# Altium PCB CH382CRD.PcbDoc
Units mil, origin at the board's own origin, x right, y up, seen from the top; angles counter-clockwise.
Board outline 2123 x 4247.94 mil, 2 copper layers (TopLayer, BottomLayer); 58 components, 90 nets, 316 pads, 158 vias.
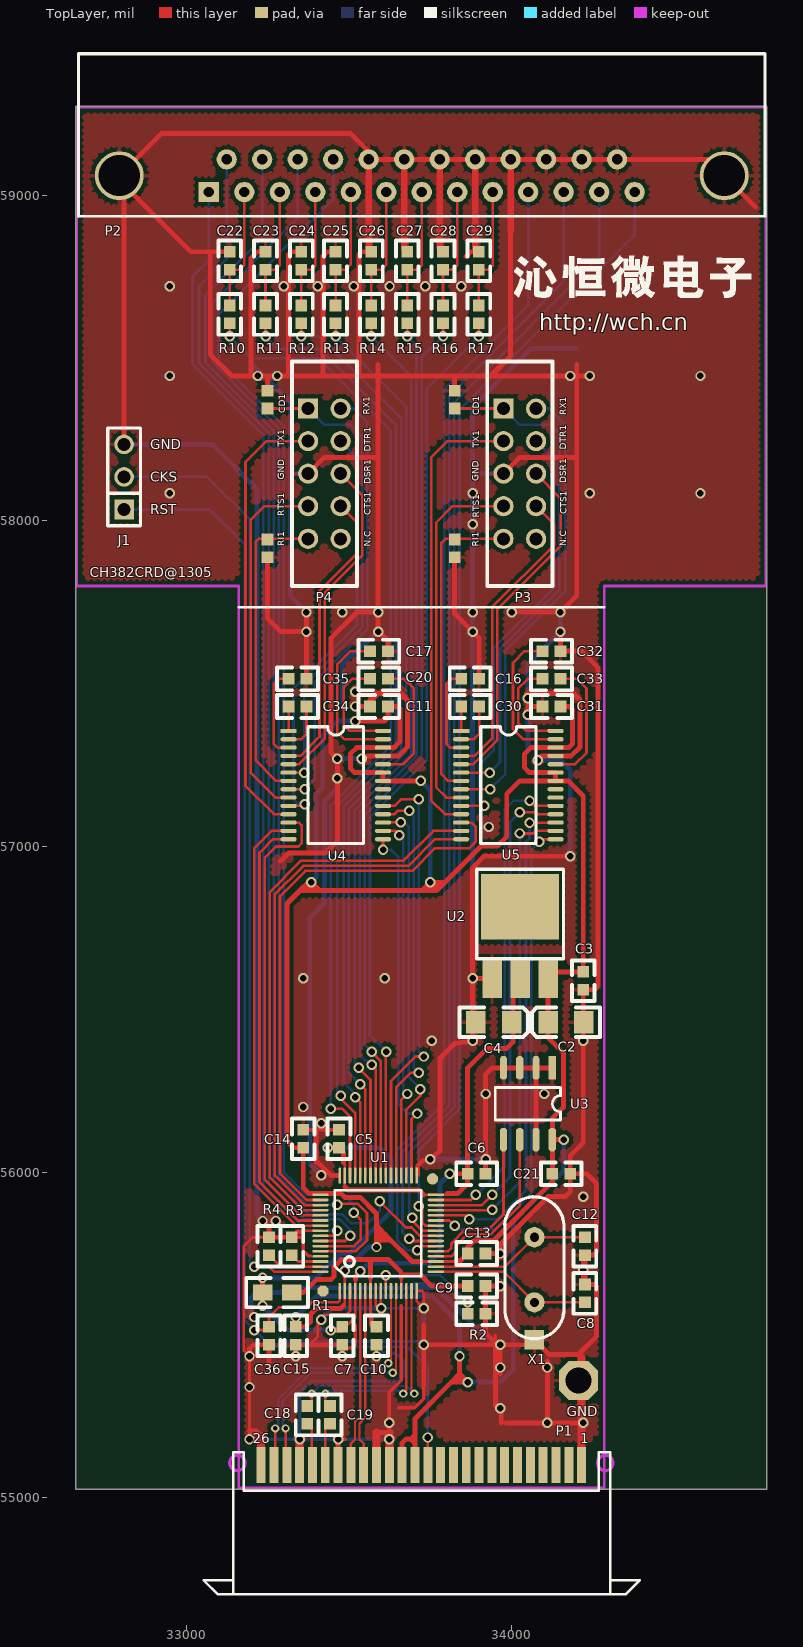
[diagram p0: TopLayer view]
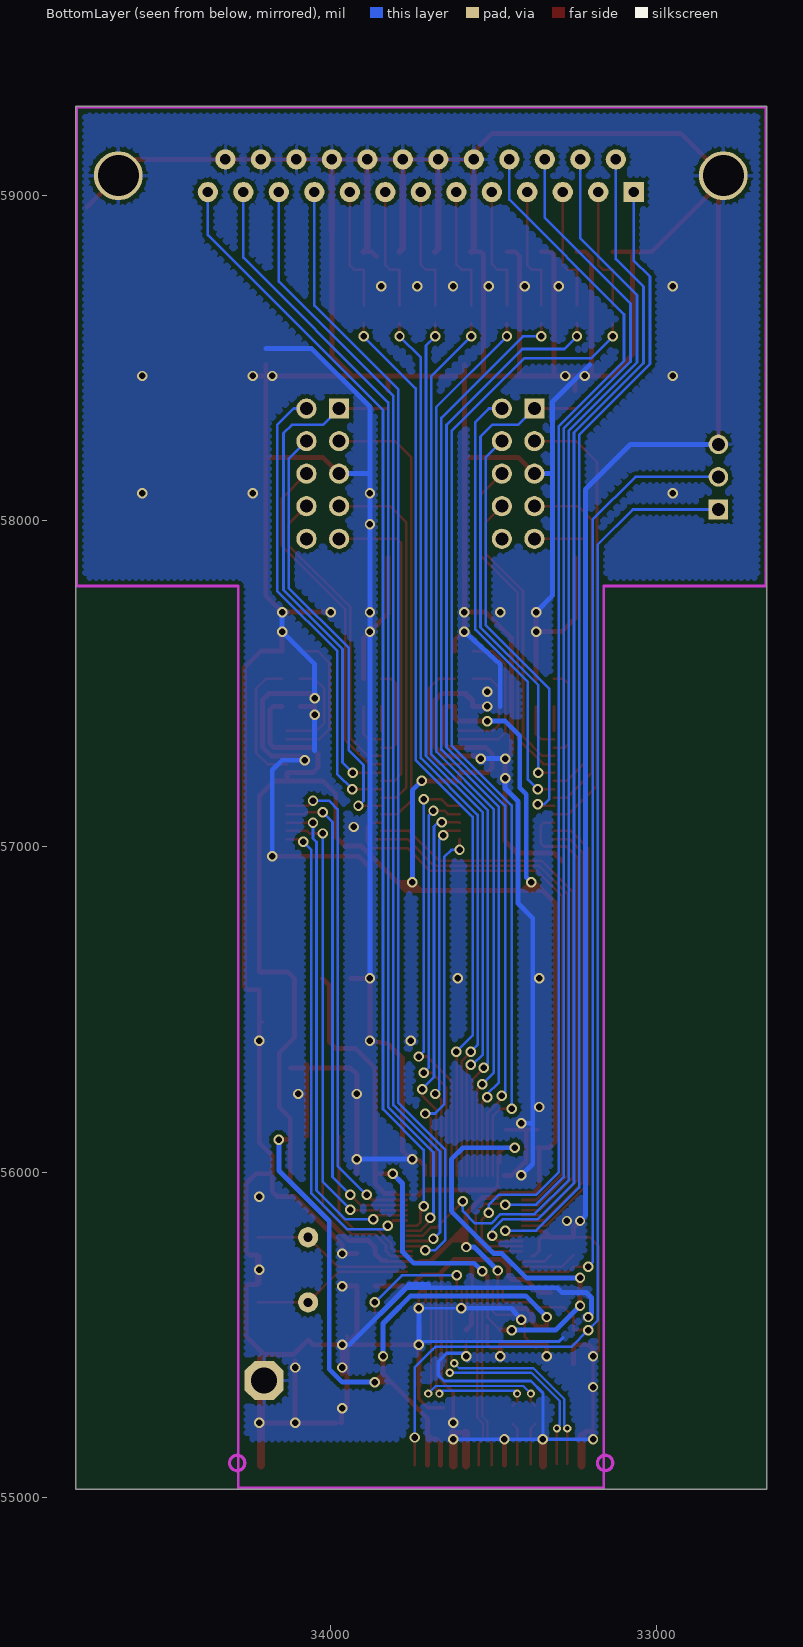
[diagram p1: BottomLayer view, seen from below]

## Layer stack, top to bottom
TopSolder: solder mask 0.4, Solder Resist, Dk 3.5
TopLayer: signal copper 1.4
Dielectric1: dielectric 12.6, FR-4, Dk 4.8
BottomLayer: signal copper 1.4
BottomSolder: solder mask 0.4, Solder Resist, Dk 3.5

## Board outline
32661,55026.06 34784,55026.06 34784,59274 32661,59274

## Design rules (kind name [scope] priority, off if disabled: settings)
Clearance Clearance_4 [(InPoly) vs InNetClass('PARTS')] p1: gap=12 ignorepadtopadclearanceinfootprint=FALSE
Clearance Clearance_2 [All vs InNetClass('PARTS')] p2: gap=7 ignorepadtopadclearanceinfootprint=FALSE
Clearance Clearance_5 [InComponent('U2')] p3: gap=15 ignorepadtopadclearanceinfootprint=FALSE
Clearance Clearance_1 [All vs (InPoly)] p4: gap=12 ignorepadtopadclearanceinfootprint=FALSE
Clearance [All] p5: gap=7.75 ignorepadtopadclearanceinfootprint=FALSE
ComponentClearance [All] p1 off: gap=10 collisioncheckmode=3 verticalgap=10 showdistances=FALSE
FabricationTestPointUsage TestPointUsage [All] p1: valid=0 allowmultiple=FALSE
FabricationTestpoint Testpoint [All] p1: side=3 testpointundercomponent=TRUE minsize=40 maxsize=100 preferedsize=60 minholesize=20 maxholesize=40 preferedholesize=32 testpointgrid=1 allowsidetop=TRUE allowsidebottom=TRUE usegrid=TRUE gridtolerance=0.01
HoleSize [All] p1 off: absolutevalues=TRUE maxlimit=120 minlimit=1 maxpercent=80.000 minpercent=20.000
PolygonConnect [All] p1: connectstyle=Relief reliefconductorwidth=10 reliefentries=4 polygonreliefangle="90 Angle" airgapwidth=10
RoutingVias RoutingVias_2 [InNetClass('PARTS')] p1: holewidth=14 width=25 viastyle="Through Hole" minholewidth=14 minwidth=25 maxholewidth=28 maxwidth=50
RoutingVias RoutingVias_1 [InNetClass('PARTS')] p2: holewidth=14 width=25 viastyle="Through Hole" minholewidth=14 minwidth=25 maxholewidth=28 maxwidth=50
RoutingVias [All] p3: holewidth=24 width=40 viastyle="Through Hole" minholewidth=24 minwidth=40 maxholewidth=28 maxwidth=40
SolderMaskExpansion [All] p1: expansion=4 istentingtop=FALSE
Width Width_2 [InNet('GND')] p1: maxlimit=30 minlimit=7 preferedwidth=15
Width Width_4 [InNetClass('PARTS')] p2: maxlimit=15 minlimit=7 preferedwidth=7
Width Width_3 [InNetClass('VCC')] p3: maxlimit=30 minlimit=7 preferedwidth=15
Width [All] p4: maxlimit=30 minlimit=7 preferedwidth=8
26 further rules are at their usual default settings.

## Classes and differential pairs
net class VCC: 1V8 3V3 3V3AUX +5V +12 -12 NetF1_2 NetJP1_3 NetU1_7
net class PARTS: NetU1_14 NetU1_15 PECKN PECKP PERN PERP PETN PETP

## Components (designator, comment, footprint, x,y, rotation, side; value= is the part's Value field where it differs from the comment)
C2 "10uF" 3216 34112,56460 r180 top
C3 "0.1uF" 0603 34220,56615 r270 top
C4 "10uF" 3216 34000,56460 r0 top
C5 "0.1uF" 0603 33470,56075 r90 top
C6 "0.1uF" 0603 33865,55995 r0 top
C7 "0.1uF" 0603 33480,55525 r270 top
C8 "27pF" 0603 34225,55600 r90 top
C9 "0.1uF" 0603 33865,55650 r0 top
C10 "0.1uF" 0603 33585,55525 r270 top
C11 "0.1uF" 0603 33620,57430 r180 top
C12 "27pF" 0603 34225,55800 r270 top
C13 "0.1uF" 0603 33865,55750 r0 top
C14 "0.1uF" 0603 33360,56075 r90 top
C15 "0.1uF" 0603 33337,55525 r270 top
C16 "0.1uF" 0603 33845,57515 r0 top
C17 "0.1uF" 0603 33565,57600 r0 top
C18 "0.1uF" 0603 33372,55227 r90 top
C19 "0.1uF" 0603 33442,55227 r90 top
C20 "0.1uF" 0603 33565,57515 r0 top
C21 "0.1uF" 0603 34125,55995 r0 top
C22 "100pF" 0603 33134.28,58771.58 r90 top
C23 "100pF" 0603 33244.28,58771.58 r90 top
C24 "100pF" 0603 33354.28,58771.58 r90 top
C25 "100pF" 0603 33459.28,58771.58 r90 top
C26 "100pF" 0603 33569.28,58771.58 r90 top
C27 "100pF" 0603 33679.28,58771.58 r90 top
C28 "100pF" 0603 33789.28,58771.58 r90 top
C29 "100pF" 0603 33899.28,58771.58 r90 top
C30 "0.1uF" 0603 33845,57430 r0 top
C31 "0.1uF" 0603 34150,57430 r180 top
C32 "0.1uF" 0603 34095,57600 r0 top
C33 "0.1uF" 0603 34095,57515 r0 top
C34 "0.1uF" 0603 33315,57430 r0 top
C35 "0.1uF" 0603 33315,57515 r0 top
C36 "1000pF" 0603 33255,55525 r270 top
J1 "3JUMPS" SIP3 32810,58035 r90 top
P1 "EXPRESS CARD" EXPCARD 34215,55100 r0 top locked
P2 "1284A" DB25RA/F 33070,59010 r0 top locked
P3 "CON10" IDC10 33975,58345 r0 top locked
P4 "CON10" IDC10 33375,58345 r0 top locked
R1 "0" 0805 33235,55630 r0 top
R2 "12K" 0603 33920,55565 r180 top
R3 "0" 0603 33325,55745 r90 top
R4 "NC" 0603 33255,55745 r90 top
R10 "33R" 0603 33134.28,58661.58 r270 top
R11 "33R" 0603 33244.28,58661.58 r270 top
R12 "33R" 0603 33354.28,58661.58 r270 top
R13 "33R" 0603 33459.28,58661.58 r270 top
R14 "33R" 0603 33569.28,58661.58 r270 top
R15 "33R" 0603 33679.28,58661.58 r270 top
R16 "33R" 0603 33789.28,58661.58 r270 top
R17 "33R" 0603 33899.28,58661.58 r270 top
U1 "CH382L" LQFP64 33472.01,55635 r0 top
U2 "LDO-1V8" SOT-223 33940,56595 r0 top
U3 "24C02" SOP8 34125,56320 r180 top
U4 "MAX3243" SSOP28 33315,57355 r0 top
U5 "MAX3243" SSOP28 33845,57355 r0 top
X1 "22.1184MHz" XTAL62/28 34070,55800 r180 top

## Footprints (in the part's own frame and the unit in brackets; to place one, negate y for a bottom-side part, rotate by r counter-clockwise, add the part's x,y. Pads: shape width x height; smd on the part's side, far side on the other; paste and mask are expansions set on the pad)
0603 [mil]
  rect 36x36 smd: 1(0,0) 2(55,0)
  silkscreen extent -35,-35 90,35
0805 [mil]
  rect 60x50 smd: 1(0,0) 2(90,0)
  silkscreen extent -50,-45 140,45
3216 [mil]
  rect 60x70 smd: 1(0,0) 2(-110,0)
  silkscreen extent -160,-45 50,45
DB25RA/F [mil]
  round 150 hole 125.98: 0(-275,50) 0(1583,50)
  rect 62x62 hole 32: 1(0,0)
  round 62 hole 32: 2(109,0) 3(218,0) 4(327,0) 5(436,0) 6(545,0) 7(654,0) 8(763,0) 9(872,0) 10(981,0) 11(1090,0) 12(1199,0) 13(1308,0) 14(55,100) 15(164,100) 16(273,100) 17(382,100) 18(491,100) 19(600,100) 20(709,100) 21(818,100) 22(927,100) 23(1036,100) 24(1145,100) 25(1254,100)
  silkscreen extent -400,-75 1708,425
EXPCARD [mm]
  rect 0.7x2.8 smd: 1(0,0) 2(-1,0) 3(-2,0) 4(-3,0) 5(-4,0) 6(-5,0) 7(-6,0) 8(-7,0) 9(-8,0) 10(-9,0) 11(-10,0) 12(-11,0) 13(-12,0) 14(-13,0) 15(-14,0) 16(-15,0) 17(-16,0) 18(-17,0) 19(-18,0) 20(-19,0) 21(-20,0) 22(-21,0) 23(-22,0) 24(-23,0) 25(-24,0) 26(-25,0)
  KeepOutLayer circle w0.254: c-26.849,0.172 r0.6
  KeepOutLayer circle w0.254: c1.851,0.172 r0.6
  silkscreen extent -29.48,-10.08 4.52,1.02
IDC10 [mil]
  rect 62x62 hole 40: 1(0,0)
  round 62 hole 40: 2(100,0) 3(0,-100) 4(100,-100) 5(0,-200) 6(100,-200) 7(0,-300) 8(100,-300) 9(0,-400) 10(100,-400)
  silkscreen extent -50,-545 150,144
LQFP64 [mm]
  round 0.889 smd: 0(-1.302,0) 0(7.246,8.746)
  rect 0.203x1.27 smd: 1(0,0)
  oval 0.203x1.27 smd: 2(0.4,0) 3(0.8,0) 4(1.2,0) 5(1.6,0) 6(2,0) 7(2.4,0) 8(2.8,0) 9(3.2,0) 10(3.6,0) 11(4,0) 12(4.4,0) 13(4.8,0) 14(5.2,0) 15(5.6,0) 16(6,0) 33(6,9) 34(5.6,9) 35(5.2,9) 36(4.8,9) 37(4.4,9) 38(4,9) 39(3.6,9) 40(3.2,9) 41(2.8,9) 42(2.4,9) 43(2,9) 44(1.6,9) 45(1.2,9) 46(0.8,9) 47(0.4,9) 48(0,9)
  oval 1.27x0.203 smd: 17(7.5,1.5) 18(7.5,1.9) 19(7.5,2.3) 20(7.5,2.7) 21(7.5,3.1) 22(7.5,3.5) 23(7.5,3.9) 24(7.5,4.3) 25(7.5,4.7) 26(7.5,5.1) 27(7.5,5.5) 28(7.5,5.9) 29(7.5,6.3) 30(7.5,6.7) 31(7.5,7.1) 32(7.5,7.5) 49(-1.5,7.5) 50(-1.5,7.1) 51(-1.5,6.7) 52(-1.5,6.3) 53(-1.5,5.9) 54(-1.5,5.5) 55(-1.5,5.1) 56(-1.5,4.7) 57(-1.5,4.3) 58(-1.5,3.9) 59(-1.5,3.5) 60(-1.5,3.1) 61(-1.5,2.7) 62(-1.5,2.3) 63(-1.5,1.9) 64(-1.5,1.5)
  silkscreen extent -0.39,1.15 6.36,7.86
SIP3 [mil]
  rect 60x60 hole 40: 1(0,0)
  round 60 hole 40: 2(100,0) 3(200,0)
  silkscreen extent -50,-50 250,50
SOP8 [mil]
  rect 22x72 smd: 1(0,0)
  oct 22x72 smd: 2(50,0) 3(100,0) 4(150,0) 5(150,220) 6(100,220) 7(50,220) 8(0,220)
  silkscreen extent -25,60 175,160
SOT-223 [mil]
  rect 60x120 smd: 1(0,0) 2(86,0) 3(172,0)
  rect 240x200 smd: ""(86,220)
  silkscreen extent -47,60 219,335
SSOP28 [mil]
  rect 50x13 smd: 1(0,0)
  oval 50x13 smd: 2(0,-25.59) 3(0,-51.18) 4(0,-76.77) 5(0,-102.36) 6(0,-127.96) 7(0,-153.55) 8(0,-179.14) 9(0,-204.73) 10(0,-230.32) 11(0,-255.91) 12(0,-281.5) 13(0,-307.09) 14(0,-332.68) 15(290,-332.68) 16(290,-307.09) 17(290,-281.5) 18(290,-255.91) 19(290,-230.32) 20(290,-204.73) 21(290,-179.14) 22(290,-153.55) 23(290,-127.96) 24(290,-102.36) 25(290,-76.77) 26(290,-51.18) 27(290,-25.59) 28(290,0)
  silkscreen extent 60,-345 230,13
XTAL62/28 [mil]
  rect 60x60 smd: 0(0,315)
  round 62 hole 28: 1(0,0) 2(0,200)
  silkscreen extent -91,-124 91,312

## Part data
C2 C4: library part Pro89C.tmp_10u_4
C3 C5 C6 C7 C9 C10 C13 C14 C15 C21: library part Pro89C.tmp_0.1u_3
C8 C12 C36: library part Pro5B1.tmp_27p_3
C11 C16 C17 C20 C30 C31 C32 C33 C34 C35: library part CAPACITOR, "Capacitor"
C18: library part Pro89C.tmp_0.1u_70
C19: library part Pro89C.tmp_0.1u_71
C22 C23 C24 C25 C26 C27 C28 C29: library part CAP, "Capacitor"
J1: library part Pro5B1.tmp_3JUMPS_1
P1: library part EXPRESSCARD
P3 P4: "Connector"
R1: library part Pro89C.tmp_0_1
R2: library part Pro5B1.tmp_12K_15
R3 R4: library part Pro3F8.tmp_0_4
R10 R11 R12 R13 R14 R15 R16 R17: library part RES2
U1: "PCIe to 2S1P: Print Port / Parallel and Dual 16C550 UART with 256 byte FIFO"
U2: library part Pro89C.tmp_LDO-1V8_68
U3: library part Pro89C.tmp_24C02_11
X1: library part Pro5B1.tmp_22.1184MHz_4

## Free pads (board coordinates)
  oct 120x120 hole 80: 0(34205,55360)
  rect 36x36 smd: 1(33250,57943) 1(33250,58345) 1(33825,57943) 1(33825,58345) 2(33250,57888) 2(33250,58400) 2(33825,57888) 2(33825,58400)

## Via types
v1: diameter 32, hole 20, TopLayer to BottomLayer, 150 vias
v2: diameter 25, hole 14, TopLayer to BottomLayer, 8 vias

## Nets (pads, with @x,y where several pads share a name; then routed paths per layer and width w, separated by ;. In a path a pad name is that pad's centre, name@x,y a point inside that pad or via, vN(x,y) a via of type N, cw(c..) or ccw(c..) an arc to the next point about the centre after c; other vN are vias at no path point)
1V8: C4.1 C5.1 C6.1 C7.1 R1.1 U1.4 U1.32 U1.47 U2.2 | length 3283
  TopLayer w8: C7.1@33480,55515 33519.25,55554.25 33519.25,55670 ; 33487.76,55955 33487.76,56030 ; 33730,55930.28 33803.5,55930.28
  TopLayer w15: v1(33235,55590) v1(33235,55675) ; v1(33435,56075) C5.1 33484.26,56060.74 33484.26,56030 ; v1(33445,55515) C7.1@33480,55515 ; 33487.76,55955 33497.76,55945 33715.28,55945 33730,55930.28 ; 33520,55670 33520,55680 v1(33535,55695) ; 33803.5,55933.78 33833.78,55933.78 33865,55965 33865,56320 33925,56380 33985,56380 34005,56400 34005,56574 U2.2 ; v1(33810,55995) C6.1
  BottomLayer w15: v1(33235,55590) 33310,55515 v1(33445,55515) ; v1(33235,55675) 33365,55675 33395,55675 33400,55675 33475,55750 33500,55750 33515,55765 33630,55880 33630,56039.25 33594.25,56075 v1(33435,56075) ; v1(33535,55695) 33560,55720 33745,55720 33780,55755 33780,55965 v1(33810,55995)
3V3: C2.1 C3.1 C11.1 C13.1 C14.1 C15.1 C21.1 C31.1 P1.14 P1.15 U1.2 U1.19 U1.49 U2.3 U3.8 U4.22 U4.23 U4.26 U5.22 U5.23 U5.26 | length 9843.6
  TopLayer w8: 33484.26,55585.39 33487.76,55588.89 33487.76,55680 ; 33725,55725.55 33840.55,55725.55
  TopLayer w15: v1(33337,55555) C15.1 33367,55525 33382,55540 33382,55562.75 ; C14.1 33360,55952.22 33378.45,55933.78 33476.81,55933.78 33488.33,55922.25 33534.97,55922.25 33585,55872.22 v1(33585,55770) 33585,55778 33607,55800 ; C14.1@33365,56075 33330,56075 33310,56095 33310,56825 33350,56865 ; 33382,55557.78 33382,55562.75 ; 33385,56865 v1(33385,56890) ; 33433,56865 33410,56865 v1(33385,56890) ; 33484.26,55590.75 33474.26,55580.75 33400,55580.75 33382,55562.75 ; 33487.76,55680 v1(33487.76,55697.76) ; v1(33520,57385) 33610,57385 33620,57395 C11.1 33649,57430 33657.25,57421.75 33657.25,57322.25 33655,57320 33638.82,57303.82 33523.82,57303.82 33505,57285 33505,57240 33517.96,57227.04 U4.23 U4.22 v1(33721.3,57201.45) ; 33585,55800 33620,55800 ; 33585,55810 33610,55810 33620,55800 ; 33585,55845 33585,55835 33620,55800 ; 33599,55792 33626.43,55792 ; P1.15 33663.82,55168.82 33675,55180 33703.19,55180 ; P1.14 33703.19,55234 33703.19,55243.19 33815,55355 ; 33703.19,55166.81 33690,55180 33703.19,55193.19 ; 33704,56865 33725,56865 v1(33750,56890) ; 33725,55725.55 33694.45,55725.55 33620,55800 ; 33750,56865 v1(33750,56890) ; 33780,56876 33764,56876 v1(33750,56890) ; 33794.74,56890 v1(33750,56890) ; 33829.97,55729.05 33844.05,55729.05 C13.1 33865,55770 33885,55790 33945,55790 34125,55970 34125,56165 34158.74,56198.74 34158.74,56366.26 34112,56413 U2.3 34132,56615 C3.1 34220,57155 34173.55,57201.45 34025,57201.45 33985,57161.45 33985,57030 33956.47,57001.47 33906.47,57001.47 33770,56865 33350,56865 ; 33840,55355 v1(33840,55434) ; U3.8 v1(34160,56100) ; U5.22 U5.23 34055,57227.04 34040,57242.04 34040,57285 34058.82,57303.82 34168.82,57303.82 ; U5.26 34174.82,57303.82 34187.25,57316.25 34187.25,57419.75 34177,57430 C31.1 ; 33350,56865 33375,56890 v1(33385,56890) ; 33350,56865 33360,56865 v1(33385,56890) ; 33815,55355 33840,55380 v1(33865,55355) 33815,55355
  BottomLayer w15: v1(33337,55555) 33402,55620 33755,55620 33820,55555 33840,55535 33840,55490 v1(33840,55434) ; v1(33385,56890) 33400,56905 33400,57160 33420,57180 33420,57340 33465,57385 v1(33520,57385) ; v1(33487.76,55697.76) 33560,55770 v1(33585,55770) ; v1(33721.3,57201.45) 33750,57172.76 v1(33750,56890) ; v1(33865,55355) 33965,55355 34005,55395 34005,55850 34160,56005 v1(34160,56100)
ACK: P2.10 U1.22 | length 3521.7
  TopLayer w8: v1(33710,55760) 33722.8,55772.8 U1.22
  BottomLayer w8: v1(33710,55760) 33680,55760 33649.25,55790.75 33649.25,56069.25 33792.76,56212.76 33792.76,58402.76 34051,58661 P2.10
AFD: P2.14 U1.58 | length 3694.8
  TopLayer w8: U1.58 33488.54,55788.54 v1(33505,55805)
  BottomLayer w8: P2.14 33125,58804.25 33040,58719.25 33040,58484.28 33253.51,58270.77 33253.51,55966.49 33364.98,55855.02 33472.71,55855.02 33505,55822.73 v1(33505,55805)
BUSY: P2.11 U1.23 | length 3520.3
  TopLayer w8: v1(33685,55795) 33691.46,55788.54 U1.23
  BottomLayer w8: v1@33690,55790 33665,55815 33665,56062.73 33808.5,56206.23 33808.5,58383.5 34160,58735 P2.11
CKS: J1.2 U1.64 | length 2949.6
  TopLayer w8: v1(33210,55710) 33255,55710 33270.94,55694.06 U1.64
  BottomLayer w8: J1.2 33065,58135 33196.26,58003.74 33196.26,55723.74 v1(33210,55710)
CTS0: U1.31 U5.19 | length 1523.1
  TopLayer w8: U1.31 33874.53,55914.53 v1(33890,55930) ; v1(34055,57140) 34070.32,57124.68 U5.19
  BottomLayer w8: v1(33890,55930) 33979.25,56019.25 33979.25,57114.25 34005,57140 v1(34055,57140)
CTS1: U1.38 U4.19 | length 1336.6
  TopLayer w8: U4.19 33639.68,57124.68 33660,57145 v1(33715,57145) ; U1.38 33629.49,56279.49 33705,56355 v1(33730,56355)
  BottomLayer w8: v1(33715,57145) 33715,56370 v1(33730,56355)
D0: R10.2 U1.46 | length 3062.9
  TopLayer w8: v1(33134.28,58566.58) R10.2 ; v1(33445,56195) 33479.25,56195 33503.5,56170.75 U1.46
  BottomLayer w8: v1(33134.28,58566.58) 33201.61,58499.25 33406.48,58499.25 33629.24,58276.5 33629.24,57310.88 33445,57126.64 v1(33445,56195)
D1: R11.2 U1.45 | length 2955.9
  TopLayer w8: v1(33244.28,58566.58) R11.2 ; v1(33475,56235) 33475,56225.75 33519.25,56181.5 U1.45
  BottomLayer w8: v1(33244.28,58566.58) 33282.9,58527.97 33412.03,58527.97 33644.99,58295.01 33644.99,57304.36 33465,57124.37 33465,56245 v1(33475,56235)
D2: R12.2 U1.44 | length 2879
  TopLayer w8: v1(33354.28,58566.58) R12.2 ; v1(33520,56230) 33535,56215 U1.44
  BottomLayer w8: v1@33354.28,58574.28 v1(33354.28,58566.58) 33410.65,58566.58 33660.73,58316.5 33660.73,57297.84 33484.25,57121.36 33484.25,56275.75 33520,56240 v1(33520,56230)
D3: R13.2 U1.43 | length 2805.4
  TopLayer w8: v1(33459.28,58566.58) R13.2 R13.2@33462.13,58603.73 ; v1(33535,56270) 33550.75,56254.25 U1.43
  BottomLayer w8: v1(33459.28,58566.58) 33676.48,58349.38 33676.48,57291.31 33500,57114.83 33500,56305 v1(33535,56270)
D4: R14.2 U1.42 | length 2760.6
  TopLayer w8: v1(33530,56320) 33566.5,56283.5 U1.42 ; v1(33569.28,58566.58) R14.2
  BottomLayer w8: v1(33530,56320) 33517.76,56332.24 33517.76,57110.32 33692.23,57284.79 33692.23,58443.64 v1(33569.28,58566.58)
D5: R15.2 U1.41 | length 2724.5
  TopLayer w8: v1(33570,56330) 33582.24,56317.76 U1.41 ; v1(33679.28,58566.58) R15.2
  BottomLayer w8: v1(33570,56330) 33565,56330 33533.5,56361.5 33533.5,57103.79 33707.98,57278.27 33707.98,58537.89 v1(33679.28,58566.58)
D6: R16.2 U1.40 | length 2736.9
  TopLayer w8: v1(33570,56370) 33597.99,56342.01 U1.40 ; v1(33789.28,58566.58) R16.2
  BottomLayer w8: v1(33570,56370) 33549.25,56390.75 33549.25,57097.27 33723.73,57271.75 33723.73,58501.03 v1(33789.28,58566.58)
D7: R17.2 U1.39 | length 2776.9
  TopLayer w8: U1.39 33613.74,56368.74 v1(33615,56370) ; v1(33899.28,58566.58) R17.2
  BottomLayer w8: v1(33615,56370) 33565,56420 33565,57090.75 33739.47,57265.22 33739.47,58406.77 v1(33899.28,58566.58)
DCD0: U1.28 U5.17 | length 1532.7
  TopLayer w8: U1.28 33857.72,55867.28 v1(33870,55855) ; v1(34055,57073.5) U5.17
  BottomLayer w8: v1(33870,55855) 33955,55855 34044.25,55944.25 34044.25,57014.25 34055,57025 v1(34055,57073.5)
DCD1: U1.35 U4.17 | length 1189.5
  TopLayer w8: U4.17 33606.5,57075 v1(33660,57075) ; U1.35 33676.73,56191.73 33720,56235 v1(33720,56255)
  BottomLayer w8: v1(33660,57075) 33669.25,57075 33683.5,57060.75 33683.5,56291.5 v1(33720,56255)
DSR0: U1.30 U5.18 | length 1508.3
  TopLayer w8: U1.30 33908.78,55898.78 v1(33940,55930) ; v1(34025,57105) 34075,57105 34080.91,57099.09 U5.18
  BottomLayer w8: v1(33940,55930) 33995,55985 33995,57075 v1(34025,57105)
DSR1: U1.37 U4.18 | length 1261.2
  TopLayer w8: U4.18 33640.59,57099.09 33651.5,57110 v1(33685,57110) ; U1.37 33645.24,56260.24 33690,56305 v1(33715,56305)
  BottomLayer w8: v1(33685,57110) 33699.25,57095.75 33699.25,56320.75 v1(33715,56305)
DTR0: U1.52 U5.13 | length 1739.6
  TopLayer w8: U1.52 33357.43,55883.03 33257.24,55983.21 33257.24,56860.1 33353.64,56956.5 33668.59,56956.5 33760,57047.91 U5.13
DTR1: U1.55 U4.13 | length 1414.2
  TopLayer w8: U4.13 33262.91,57047.91 33210,56995 33210,55963.64 33337.86,55835.79 U1.55
ERR: P2.15 U1.24 | length 3935.5
  TopLayer w8: v1(33595,55910) 33675,55830 33692.73,55830 33718.44,55804.29 U1.24
  BottomLayer w8: P2.15 33234,58867.5 33060,58693.5 33060,58486.55 33269.26,58277.29 33269.26,55975.74 33374.23,55870.77 33479.23,55870.77 33507.46,55842.54 33557.54,55842.54 33595,55880 v1(33595,55910)
GND: C2.2 C3.2 C4.2 C5.2 C6.2 C7.2 C8.2 C9.2 C10.2 C11.2 C12.2 C13.2 C14.2 C15.2 C16.2 C17.2 C21.2 C22.2 C23.2 C24.2 C25.2 C26.2 C27.2 C28.2 C29.2 C31.2 C32.2 C35.2 C36.2 J1.3 P1.1 P1.16 P1.17 P1.20 P1.23 P1.26 P2.0 P2.18 P2.19 P2.20 P2.21 P2.22 P2.23 P2.24 P2.25 P3.5 P4.5 pad.0 pad.2 R2.1 R3.2 R4.2 U1.3 U1.8 U1.9 U1.16 U1.33 U1.48 U1.56 U1.61 U2.1 U3.1 U3.2 U3.3 U3.4 U3.7 U4.25 U5.25 X1.0 | length 36499.6
  TopLayer w8: 33195,55205 v1(33195,55435) 33177.68,55452.32 33177.68,55772.68 33205,55800 R4.2 ; 33341.5,55820.04 U1.56 ; 33370,55460 33405,55495 33405,55542 33424.5,55561.5 33491.5,55561.5 33503.5,55573.5 U1.3 ; v1(33480,55435) C7.2@33480,55460 ; U1.8 33582.24,55589.76 33590,55582 33597.99,55589.99 U1.9 ; 34050,57430 v1(34050,57455) ; 33708.23,55603.77 v1(33730,55582) 33730,55625 33730,55630 33725,55635 U1.16 33708.23,55603.77
  TopLayer w10: 33195,55205 v1(33195,55180) 33229.75,55180 ; R3.2 33353,55800 33360,55793 33360,55759.1 33376.8,55742.3 33384.02,55742.3 ; C14.2@33365,56130 C5.2@33465,56130 ; v1(33466.97,55180) 33489,55180 ; C7.2@33475,55455 33480,55460 33510,55460 33519.5,55469.5 33519.5,55529.5 ; v1(33585,55435) C10.2 ; 33624.45,55200.55 33624.45,55323.45 33660.98,55359.98 33660.98,55589.25 ; 33653,55276 33697,55276 33702,55276 33730,55304 33730,55309 33730,55345 ; v1@33950,55279 33950,55354 33950,55498 ; 33968,55230 v1@33968,55265 ; pad.0@34190,55345 pad.0 ; C2.2@34210,56460 C2.2@34220,56470
  TopLayer w15: P2.0@32784.28,59056.58 33014.28,58826.58 C22.2 ; J1.3 P2.0@32810,59080 ; P2.0@32810,59045 32795,59060 32925,59190 33505,59190 33561,59134 P2.18 34603,59110 34749.28,58963.72 ; 33074.28,58826.58 33074.28,58510.72 33140,58445 v1(34240,58445) ; 33195,55205 33215,55205 33230.75,55189.25 ; v1(33195,55435) 33195,55457.06 33207.94,55470 C36.2 33255,55410 ; 33199.28,58445.72 33199.28,58806.58 33219.28,58826.58 C23.2 ; P1.26@33230,55100.75 P1.26 ; v1(33235,55850) 33255,55830 R4.2 R3.2 33341.54,55816.54 33351.5,55816.54 ; pad.2@33250,57888 33250,57701 33291,57660 v1(33370,57660) ; pad.2@33250,58400 33250,58445 ; 33290,56955 33315,56980 33428.5,56980 33465,57016.5 v1@33465,57265 ; 33315.22,58445.22 33315.22,58817.52 33324.28,58826.58 C24.2 ; v1(33337,55435) C15.2 C7.2 v1(33480,55435) ; C35.2 33370,57615 v1(33370,57660) ; v1(33370,57720) v1(33370,57660) ; P4.5 33425,58195 33580,58195 ; 33400,56030 33400,56130 ; 33405,56030 33445.67,55989.33 U1.48@33468.51,55989.33 ; 33421.28,58448.72 33421.28,58813.58 33434.28,58826.58 C25.2 ; v1(33465,57270) 33445,57290 33445,57640 33525,57720 v1(33590,57720) ; P1.20 v1(33466.97,55180) ; v1@33510,57430 C11.2 ; 33531.28,58448.72 33531.28,58818.58 33539.28,58826.58 C26.2 C26.2@33566.22,58829.65 ; v1(33540,57270) 33558.23,57278.23 33653.23,57278.23 33680,57305 33680,57450 33660,57470 33590,57470 33565,57445 C11.2 ; 33585,57470 33565,57450 C11.2 ; 33585.08,55175 33585.08,55190 33595.08,55200 33610,55200 33624.45,55185.55 v1(33624.45,55180) ; 33590,58480 v1(33590,57660) ; v1@33595,57660 v1(33590,57660) ; C17.2 33620,57635 v1(33590,57660) ; C27.2@33675.22,58830.65 C27.2 ; U1.33@33711.73,55992.83 33711.73,56020 33726.73,56035 v1(33750,56040) 33780,56065 33780,56350 33825,56395 v1(33880,56403) 33880,56935 33915,56970 v1(34180,56970) ; 33730,55345 33730,55350 33730,55530 ; v1(33730,55470) 34055,55470 X1.0 34115,55440 34205,55440 ; C28.2@33784.22,58831.65 C28.2 ; pad.2@33825,57888 33825,57715 v1(33880,57660) 33900,57640 C16.2 ; pad.2@33825,58400 33825,58444 ; 33860.22,58812.52 33874.28,58826.58 C29.2 C29.2@33893.22,58832.65 ; v1(33880,56595) 33895,56595 U2.1 ; C13.2 v1(33965,55750) 33965,55777.83 34112.17,55925 34165,55925 34180,55940 34180,56050 34220,56090 C3.2 34255,56560 34264.86,56569.86 34264.86,57550.14 34215,57600 C32.2 v1(34150,57660) ; C6.2 33920,56300 33940,56320 U3.1 ; 33935,58445 33997,58507 33997,58890 ; 33950,55297 33950,55354 v1@33950,55465 ; 33950,55311 33950,55283 33968,55265 33968,55230 ; v1@33955,55470 33920,55505 C9.2 v1(33965,55650) ; 33965,55380 v1(33965,55470) ; P3.5 34025,58195 34200,58195 ; 33982,55230 34212,55230 v1@34220,55222 ; v1(34000,57720) v1(34150,57720) 34200,57770 34200,58480 ; v1@34045,57470 34190,57470 34210,57450 34210,57305 34183.23,57278.23 U5.25 34093.23,57278.23 v1(34080,57265) ; v1(34050,57405) 34050,57430 C31.2 ; U3.7@34075,56110 U3.2@34075,56330 ; v1(34110,55230) 34110,55420 ; C21.2 34230.82,55995 34260.82,55965 34260.82,55755.82 34250,55745 C12.2 C8.2 ; 34215,55430 34205,55440 ; C12.2@34220,55740 v1(34220,55700) 34220,55660 C8.2 ; 34205,55440 34260.82,55495.82 34260.82,55649.18 34255,55655 C8.2
  TopLayer w20: P2.18 33561,58834.87 C26.2 ; P2.19 33670,58835.87 C27.2 ; P2.20 33779,58836.87 C28.2 ; P2.21 33888,58837.87 C29.2 ; 33997,58890 P2.22
  TopLayer w25: P1.26 33230.75,55189.25 ; P1.23 v1@33348.86,55183.86 ; P1.17 33585.08,55199.92 ; P1.16 33624.45,55200.55 ; P1.1 34215,55430
  BottomLayer w8: v1@33590,55582 v1(33730,55582) 33730,55530
  BottomLayer w10: v1(33195,55180) v1@33350,55180 ; 33287.85,55491 33298.85,55480 33720,55480 v1(33730,55470) ; v1(33585,55435) 33581,55444 33644,55444 ; 33611,55444 33644,55444 ; v1(33624.45,55180) v1(33466.97,55180) v1(33348.86,55180) 33348.86,55321.86 33385.5,55358.5 33652,55358.5 33670,55376.5 33670,55418 33644,55444
  BottomLayer w15: J1.3 33080,58235 33218.51,58096.49 33218.51,55866.49 v1(33235,55850) ; 33199.76,55569.76 33199.76,55614.76 33215,55630 33290,55630 33305,55645 33768.62,55645 33777.42,55636.21 ; 33199.76,55600 33199.76,55565.24 v1(33210,55555) ; 33205,58480 33320,58365 33320,57770 v1(33370,57720) ; 33320,58145 P4.5 ; 33380,56150 v1(33415,56150) ; v1@33415,55545 33445,55582 v1(33600,55582) ; v1(33415,55990) 33380,56025 33380,56780 33425,56825 33425,57138.12 33465,57178.12 v1(33465,57210) ; v1(33465,57270) v1(33540,57270) ; 33480,57430 33480,57560 v1(33590,57660) ; 33700,55655 33758.62,55655 33943.62,55470 v1(33965,55470) ; v1(33730,55470) v1(33730,55582) ; v1(33750,56040) v1(33920,56040) ; v1@33880,56610 33880,58350 34060,58530 34200,58530 ; 33880,58150 33885,58145 P3.5 ; 34050,57295 v1(34050,57405) ; v1(34050,57455) 34050,57560 v1(34150,57660) v1(34150,57720) ; v1@34070,57265 34150,57265 34180,57235 v1(34180,56970)
  other v1: 33624.45,55230 34220,55230 33965,55275 33195,55340 33965,55400 34110,55400 33415,55547 33275,55850 34220,55925 33360,56200 33920,56240 34100,56240 33755,56403 34220,56403 33360,56595 33610,56595 33930,57060 33520,57430 33520,57475 33480,57720 33880,57720 33880,57990 32950,58085 33880,58085 34240,58085 34580,58085 32950,58445 33220,58445 33280,58445 34180,58445 34580,58445 32950,58720 33300,58720 33405,58720 33515,58720 33625,58720 33735,58720 33845,58720
INIT: P2.16 U1.60 | length 3878.2
  TopLayer w8: U1.60 33522.05,55757.05 33555.75,55790.75 33555.75,55874.25 33527,55903 33468,55903 v1(33465,55900)
  BottomLayer w8: P2.16 33343,58930.76 33080,58667.76 33080,58488.82 33285,58283.82 33285,55985 33370,55900 v1(33465,55900)
NCD0: P3.1 pad.1@33825,58345 U5.6 | length 1716.4
  TopLayer w8: pad.1@33825,58345 P3.1 pad.1@33829,58345 ; U5.6 v1(33932.96,57227.04)
  BottomLayer w8: v1(33932.96,57227.04) 33964.25,57258.34 33964.25,57606.52 34145.75,57788.02 34145.75,58269.25 34120,58295 34025,58295 P3.1
NCD1: P4.1 pad.1@33250,58345 U4.6 | length 1481.1
  TopLayer w8: pad.1@33249,58345 P4.1 ; U4.6 v1(33362.96,57227.04)
  BottomLayer w8: v1(33362.96,57227.04) 33362.96,57495.23 33540.75,57673.02 33540.75,58259.25 33505,58295 33425,58295 P4.1
NCTS0: P3.8 U5.4 | length 931.6
  TopLayer w8: U5.4 33885.96,57278.23 33940,57332.27 33940,57735 34130,57925 34130,57990 P3.8
NCTS1: P4.8 U4.4 | length 895.5
  TopLayer w8: U4.4 33350.96,57278.23 33410,57337.27 33410,57785 33525,57900 33525,57995 P4.8
NDSR0: P3.6 U5.5 | length 1072.4
  TopLayer w8: U5.5 33882.64,57252.64 33955.75,57325.75 33955.75,57728.48 34150.75,57923.48 34150.75,58069.25 P3.6
NDSR1: P4.6 U4.5 | length 1032.2
  TopLayer w8: U4.5 33347.64,57252.64 33425.75,57330.75 33425.75,57778.48 33540.75,57893.48 33540.75,58079.25 P4.6
NDTR0: P3.4 U5.10 | length 1315
  TopLayer w8: U5.10 v1(33915.32,57124.68)
  BottomLayer w8: v1(33915.32,57124.68) 33900,57140 33900,57250 33945,57295 33945,57609.54 34130,57794.54 34130,58190 P3.4
NDTR1: P4.4 U4.10 | length 1295.1
  TopLayer w8: U4.10 33359.68,57124.68 v1(33365,57130)
  BottomLayer w8: v1(33365,57130) 33344.68,57130 33330,57144.68 33330,57484.54 33525,57679.54 33525,58195 P4.4
NetC8_1: C8.1 U1.17 X1.2 | length 496.7
  TopLayer w8: U1.17 33975.94,55694.06 X1.2 C8.1
NetC16_1: C16.1 U5.3 | length 285.8
  TopLayer w8: U5.3 33811.18,57303.82 33800,57315 33800,57500 33815,57515 C16.1
NetC30_1: C30.1 U5.1 | length 75
  TopLayer w8: U5.1 C30.1
NetC30_2: C30.2 U5.2 | length 146.5
  TopLayer w8: U5.2 33884.41,57329.41 33900,57345 C30.2
NetC34_1: C34.1 U4.1 | length 75
  TopLayer w8: U4.1 C34.1
NetC34_2: C34.2 U4.2 | length 146.5
  TopLayer w8: U4.2 33354.41,57329.41 33370,57345 C34.2
NetC35_1: C35.1 U4.3 | length 285.8
  TopLayer w8: U4.3 33281.18,57303.82 33270,57315 33270,57500 33285,57515 C35.1
NetU1_7: C9.1 C10.1 R1.2 U1.7 U1.13 | length 1014.7
  TopLayer w8: 33566.5,55533.5 33566.5,55675 ; U1.13 33660.98,55675
  TopLayer w15: R1.2 33360,55630 33400,55670 33445,55670 33455,55680 33455,55710 33476.18,55731.18 33622.32,55731.18 33660.98,55692.52 33660.98,55675 ; 33566.5,55675 33566.5,55731.18 ; 33568.75,55552.23 C10.1@33568.75,55531.25 ; 33568.75,55562.75 C10.1@33568.75,55531.25 ; C10.1@33585,55515 C10.1@33568.75,55531.25 ; 33715,55685 33660.98,55685 33720,55685 33755,55650 C9.1
NetU1_10: R2.2 U1.10 | length 385.6
  TopLayer w8: U1.10 v1(33613.74,55682.99) ; R2.2 v1(33865,55600)
  BottomLayer w8: v1(33613.74,55682.99) 33772.01,55682.99 ; 33755,55682.99 33782.01,55682.99 v1(33865,55600)
NetU1_14: C19.2 U1.14 | length 609.3
  TopLayer w7: v2(33428,55320) 33428,55296 C19.2 ; v2(33667,55320) 33676.73,55329.73 U1.14
  BottomLayer w7: v2(33428,55320) 33437,55329 33658,55329 v2(33667,55320)
NetU1_15: C18.2 U1.15 | length 696.4
  TopLayer w7: C18.2 33386,55296 v2(33386,55320) ; U1.15 33692.48,55328.52 v2(33701,55320)
  BottomLayer w7: v2(33386,55320) 33409,55343 33678,55343 v2(33701,55320)
NetU1_62: R3.1 U1.62 | length 96
  TopLayer w8: R3.1 33344.45,55725.55 U1.62
NetU1_63: R4.1 U1.63 | length 172.5
  TopLayer w8: R4.1 33290.2,55709.8 U1.63
NetU4_24: C20.2 U4.24 | length 400.8
  TopLayer w8: U4.24 33667.64,57252.64 33700,57285 33700,57485 33670,57515 C20.2
NetU4_27: C17.1 U4.27 | length 475.1
  TopLayer w8: C17.1 33505,57600 33465,57560 33465,57350 33485.59,57329.41 U4.27
NetU4_28: C20.1 U4.28 | length 335.2
  TopLayer w8: C20.1 33510,57515 33485,57490 33485,57372.27 33502.27,57355 U4.28
NetU5_24: C33.2 U5.24 | length 399.3
  TopLayer w8: U5.24 34195,57252.64 34230,57287.64 34230,57485 34200,57515 C33.2
NetU5_27: C32.1 U5.27 | length 452.8
  TopLayer w8: C32.1 34040,57600 34004.25,57564.25 34004.25,57360.75 34035.59,57329.41 U5.27
NetU5_28: C33.1 U5.28 | length 317.8
  TopLayer w8: C33.1 34050,57515 34020,57485 34020,57380 34045,57355 U5.28
NetX1_1: C12.1 U1.18 X1.1 | length 495.1
  TopLayer w8: U1.18 33979.8,55709.8 X1.1 C12.1
NRI0: P3.9 pad.1@33825,57943 U5.7 | length 975.4
  TopLayer w8: U5.7 33805,57201.45 33784.25,57222.2 33784.25,57879.25 33784.25,57932.25 33797,57945 33850,57945 P3.9
NRI1: P4.9 pad.1@33250,57943 U4.7 | length 1023.5
  TopLayer w8: U4.7 33276.45,57201.45 33214.25,57263.66 33214.25,57844.25 33214.25,57913.25 33214.25,57936.25 33223,57945 33246,57945 P4.9 33315,57945
NRTS0: P3.7 U5.9 | length 1129.7
  TopLayer w8: U5.9 33800,57150.27 33768.5,57181.77 33768.5,57958.5 33768.5,57994.5 33819,58045 33855,58045 P3.7
NRTS1: P4.7 U4.9 | length 1118
  TopLayer w8: U4.9 33275,57150.27 33198.5,57226.77 33198.5,57933.5 33198.5,58002.5 33241,58045 33310,58045 P4.7
NRX0: P3.2 U5.8 | length 1414.6
  TopLayer w8: U5.8 v1(33934.14,57175.86)
  BottomLayer w8: v1(33934.14,57175.86) 33980,57221.73 33980,57600 34165,57785 34165,58295 34115,58345 P3.2
NRX1: P4.2 U4.8 | length 1355.6
  TopLayer w8: U4.8 v1(33365,57175.86)
  BottomLayer w8: v1(33365,57175.86) 33395,57205.86 33395,57505 33556.5,57666.5 33556.5,58303.5 33515,58345 P4.2
NTX0: P3.3 U5.11 | length 1406.2
  TopLayer w8: U5.11 33795,57099.09 33752.76,57141.33 33752.76,58142.76 33752.76,58194.76 33803,58245 33855,58245 P3.3
NTX1: P4.3 U4.11 | length 1381.7
  TopLayer w8: U4.11 33270,57099.09 33182.76,57186.33 33182.76,58132.76 33182.76,58180.76 33247,58245 33295,58245 P4.3
PD0: C22.1 P2.2 R10.1 | length 384.5
  TopLayer w8: R10.1 C22.1 33164.28,58771.58 33179,58786.3 P2.2
PD1: C23.1 P2.3 R11.1 | length 384.1
  TopLayer w8: R11.1 C23.1 33274.28,58771.58 33288,58785.3 P2.3
PD2: C24.1 P2.4 R12.1 | length 383.7
  TopLayer w8: R12.1 C24.1 33384.28,58771.58 33397,58784.3 P2.4
PD3: C25.1 P2.5 R13.1 | length 385.3
  TopLayer w8: R13.1 C25.1 33489.28,58771.58 33506,58788.3 P2.5
PD4: C26.1 P2.6 R14.1 | length 384.9
  TopLayer w8: R14.1 C26.1 33599.28,58771.58 33615,58787.3 P2.6
PD5: C27.1 P2.7 R15.1 | length 384.5
  TopLayer w8: R15.1 C27.1 33709.28,58771.58 33724,58786.3 P2.7
PD6: C28.1 P2.8 R16.1 | length 384.1
  TopLayer w8: R16.1 C28.1 33819.28,58771.58 33833,58785.3 P2.8
PD7: C29.1 P2.9 R17.1 | length 383.7
  TopLayer w8: R17.1 C29.1 33929.28,58771.58 33942,58784.3 P2.9
PE: P2.12 U1.25 | length 3490.7
  TopLayer w8: v1(33695,55860) 33695,55850 33724.96,55820.04 U1.25
  BottomLayer w8: v1(33695,55860) 33685,55870 33685,56060.46 33824.25,56199.71 33824.25,58364.25 34269,58809 P2.12
PECKN: P1.18 U1.6 | length 547.6
  TopLayer w7: P1.18 33545.71,55166.29 33533,55179 33533,55228 33550.75,55245.75 U1.6
PECKP: P1.19 U1.5 | length 546.9
  TopLayer w7: P1.19 33506.34,55166.34 33519,55179 33519,55234 33535,55250 U1.5
PERN: C19.1 P1.21 | length 132.4
  TopLayer w7: P1.21@33428,55100.4 33428,55134 33428,55213 C19.1
PERP: C18.1 P1.22 | length 130.6
  TopLayer w7: C18.1 33386,55213 33386,55134 P1.22@33386,55102.23
PETN: P1.24 U1.12 | length 826.5
  TopLayer w7: P1.24@33306,55103.49 v2(33306,55213) ; v2(33635,55384) 33645.24,55394.24 U1.12
  BottomLayer w7: v2(33306,55213) 33297,55222 33297,55297 33384,55384 v2(33635,55384)
PETP: P1.25 U1.11 | length 811.8
  TopLayer w7: P1.25@33274,55103.88 v2(33274,55213) ; v2(33621,55413) 33629.49,55421.49 U1.11
  BottomLayer w7: v2(33274,55213) 33283,55222 33283,55302.8 33378.2,55398 33606,55398 v2(33621,55413)
RI0: U1.29 U5.16 | length 1477
  TopLayer w8: U1.29 33938.03,55883.03 v1(33940,55885) ; v1(34025,57040) 34065,57040 34072.91,57047.91 U5.16
  BottomLayer w8: v1(33940,55885) 34025,55970 v1(34025,57040)
RI1: U1.36 U4.16 | length 1119.2
  TopLayer w8: U4.16 33642.09,57047.91 v1(33655,57035) ; U1.36 33660.98,56220.98 v1(33680,56240)
  BottomLayer w8: v1(33655,57035) 33667.76,57022.24 33667.76,56252.24 v1(33680,56240)
RST#: C36.1 J1.1 P1.13 U1.1 | length 4087.6
  TopLayer w8: v1(33210,55515) 33255,55515 33255,55555 33285,55585 33370,55585 33385,55600 33466.28,55600 33472.01,55605.72 U1.1 ; P1.13 v1(33742.56,55185)
  BottomLayer w8: J1.1 33072.76,58035 33180.51,57927.25 33180.51,55544.49 ; 33180.51,55560 33180.51,55544.49 ; v1(33742.56,55185) 33742.56,55400 33687.56,55455 33679.31,55463.25 33261.75,55463.25 v1(33210,55515) 33180.51,55544.49
RTS0: U1.51 U5.14 | length 1701.1
  TopLayer w8: U1.51 33363.95,55898.78 33272.99,55989.74 33272.99,56853.58 33360.16,56940.75 33683.43,56940.75 33765,57022.32 U5.14@33862.68,57022.32
RTS1: U1.54 U4.14 | length 1353.4
  TopLayer w8: U4.14 33267.32,57022.32 33225.75,56980.75 33225.75,55970.17 33344.38,55851.54 U1.54
RXD0: U1.27 U5.15 | length 1492.7
  TopLayer w8: U1.27 33808.46,55851.54 v1(33825,55835) ; v1(34085,57015) 34092.32,57022.32 U5.15
  BottomLayer w8: v1(33825,55835) 33835,55825 33950,55825 34060,55935 34060,56990 v1(34085,57015)
RXD1: U1.34 U4.15 | length 1116
  TopLayer w8: v1(33605,56990) U4.15 ; U1.34 33692.48,56162.48 v1(33710,56180)
  BottomLayer w8: v1(33605,56990) 33630,56990 33652.01,56967.99 33652.01,56207.99 33680,56180 v1(33710,56180)
SCL: U1.20 U3.6 | length 561.3
  TopLayer w8: U1.20@33751.54,55741.3 33815,55741.3 33830.75,55757.05 33830.75,55775 33865,55809.25 33937.03,55809.25 34025,55897.22 U3.6@34025,56110
SDA: U1.21 U3.5 | length 519
  TopLayer w8: U1.21@33751.54,55757.05 33805,55757.05 33815,55767.05 33815,55781.52 33858.48,55825 33930.51,55825 33975,55869.49 U3.5@33975,56110
SELT: P2.13 U1.26 | length 3489.4
  TopLayer w8: v1(33715,55895) 33724.96,55885.04 33724.96,55845.83 33735,55835.79 U1.26
  BottomLayer w8: v1(33715,55895) 33715,56068.19 33840,56193.19 33840,58340 34378,58878 P2.13
SIN: P2.17 U1.59 | length 3842.2
  TopLayer w8: U1.59 33515.52,55772.8 33536.25,55793.52 33536.25,55853.75 v1(33515,55875)
  BottomLayer w8: P2.17 33452,58986.36 33100,58634.36 33100,58491.09 33300.75,58290.34 33300.75,55999.25 33370,55930 33485,55930 33515,55900 v1(33515,55875)
STB: P2.1 U1.57 | length 3509.2
  TopLayer w8: U1.57 33449.29,55804.29 v1(33465,55820)
  BottomLayer w8: P2.1 33070,58800 33020,58750 33020,58482.01 33237.76,58264.25 33237.76,55952.24 33370,55820 v1(33465,55820)
TXD0: U1.50 U5.12 | length 1775.3
  TopLayer w8: U1.50 33370.47,55914.53 33288.74,55996.26 33288.74,56847.06 33366.68,56925 33695,56925 33765,56995 33870,56995 33890,57015 33890,57060 33876.5,57073.5 U5.12
TXD1: U1.53 U4.12 | length 1435.7
  TopLayer w8: U4.12 33346.5,57073.5 33355,57065 33355,57010 33345,57000 33276.5,57000 33241.5,56965 33241.5,55976.69 33350.9,55867.28 U1.53
pads on no net: P1.2 P1.3 P1.4 P1.5 P1.6 P1.7 P1.8 P1.9 P1.10 P1.11 P1.12 P3.10 P4.10 U1.0 U2. U4.20 U4.21 U5.20 U5.21

## Polygon pours and split planes (outlines as drawn)
GND on TopLayer "TopLayer-GND" (hatched 90Degree grid 20 track 20, remove dead copper, pour order 0): 32670,59270 32670,57800 33165,57800 33165,55180 34290,55180 34290,57800 34785,57800 34785,59270
GND on BottomLayer "BottomLayer-GND" (hatched 90Degree grid 20 track 20, remove dead copper, pour order 1): 32670,59270 32670,57800 33165,57800 33165,55180 34290,55180 34290,57800 34785,57800 34785,59270

## Keep-outs
KeepOutLayer:
  lines w7.87: 32665,57800 33162,57800 33162,55030 34284.05,55030 34284.05,57800 ; 32665,59270 34780,59270
  lines w8: 32665,57800 32665,59270 ; 34284.05,57800 34780,57800 34780,59270

## Silkscreen, mask and mechanical layers (free items; w line width, h text height)
TopOverlay:
  drawing of 2666 lines, arcs and shapes, not listed
  text "http://wch.cn" at 34085,58585 h50
  text "CD1" at 33305,58330 h20 r90
  text "RX1" at 33564,58326 h20 r90
  text "CD1" at 33901,58324 h20 r90
  text "RX1" at 34168,58324 h20 r90
  text "TX1" at 33302,58228 h20 r90
  text "TX1" at 33900,58225 h20 r90
  text "GND" at 32890,58220 h30
  text "DTR1" at 34168,58219 h20 r90
  text "DTR1" at 33568,58212 h20 r90
  text "GND" at 33302,58127 h20 r90
  text "GND" at 33899,58122 h20 r90
  text "CKS" at 32890,58120 h30
  text "DSR1" at 34168,58115 h20 r90
  text "DSR1" at 33567,58112 h20 r90
  text "RST" at 32890,58020 h30
  text "CTS1" at 34170,58020 h20 r90
  text "CTS1" at 33567,58018 h20 r90
  text "RTS1" at 33302,58014 h20 r90
  text "RTS1" at 33900,58009 h20 r90
  text "RI1" at 33302,57922 h20 r90
  text "N.C" at 34168,57922 h20 r90
  text "N.C" at 33567,57920 h20 r90
  text "RI1" at 33899,57920 h20 r90
  text "CH382CRD@1305" at 32705,57827 h30
  text "GND" at 34170,55250 h30

## Text inside footprints (layer, text, board x,y; h text height)
P1: TopOverlay "1" at 34210,55167.13 h30; TopOverlay "26" at 33205,55167.13 h30